# Altium PCB old_pcb.PcbDoc
Units mil, origin at the board's own origin, x right, y up, seen from the top; angles counter-clockwise.
Board outline 250 x 212 mil, 2 copper layers (Top Layer, Bottom Layer); 24 components, 18 nets, 66 pads, 20 vias.
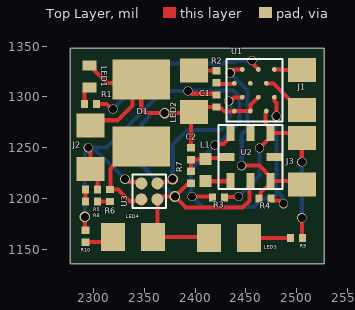
[diagram p0: Top Layer view]
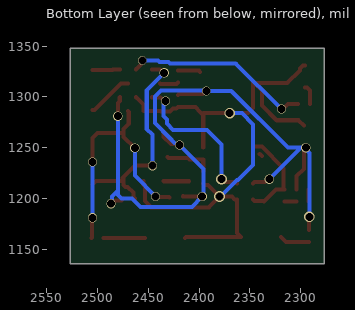
[diagram p1: Bottom Layer view, seen from below]

## Layer stack, top to bottom
Top Solder: solder mask 0.4, Solder Resist, Dk 3.5
Top Layer: signal copper 1.4
Dielectric 1: dielectric 12.6, FR-4, Dk 4.8
Bottom Layer: signal copper 1.4
Bottom Solder: solder mask 0.4, Solder Resist, Dk 3.5

## Board outline
2277,1136 2527,1136 2527,1348 2277,1348

## Design rules (kind name [scope] priority, off if disabled: settings)
Clearance [All] p1: gap=4 ignorepadtopadclearanceinfootprint=FALSE except(0: Arc-Text Arc-Hole Track-Text Track-Hole SMDPad-Text SMDPad-Hole THPad-Text THPad-Hole Via-Text Via-Hole Fill-Text Fill-Hole Poly-Text Poly-Hole Region-Text Region-Hole Text-Text Text-Hole; 3.9: SMDPad-SMDPad)
HoleToHoleClearance [All] p1: gap=4 allowstackedmicrovias=TRUE
MinimumSolderMaskSliver [All] p1: minsoldermaskwidth=3.92
PolygonConnect [All] p1: connectstyle=Relief reliefconductorwidth=10 reliefentries=4 polygonreliefangle="90 Angle" airgapwidth=10
RoutingVias [All] p1: holewidth=28 width=50 viastyle="Through Hole" minholewidth=28 minwidth=50 maxholewidth=28 maxwidth=50
SilkToSilkClearance [All] p1: silktosilkclearance=0
SilkToSolderMaskClearance [IsPad] p1: minsilkscreentomaskgap=0 clearancetoexposedcopper=TRUE
SolderMaskExpansion [All] p1: expansion=0 istentingtop=FALSE
Width [All] p1: maxlimit=10 minlimit=4 preferedwidth=4 minimp=50.000000 maximp=50.000000 favimp=50.000000
26 further rules are at their usual default settings.

## Components (designator, comment, footprint, x,y, rotation, side; value= is the part's Value field where it differs from the comment)
C1 "0.1 uF" 01005 2421,1295.91 r180 top
C2 "0.1 uF" 01005 2396,1244.09 r0 top
D1 "Photodiode" FP-6_541-5064_01-4-MFG 2347,1282 r90 top
J1 "0402" 0402#1 2505,1307 r0 top
J2 "0402" 0402#2 2297,1252 r0 top
J3 "0402" 0402#3 2505,1240 r0 top
L1 "Antenna Header" 0402#4 2410,1243 r0 top
LED1 "Red" 0201 2296,1320 r0 top
LED2 "IR" 0402#5 2399,1305 r180 top value="IR LED"
LED3 "IR" 0402#1 2433.59,1161.09 r90 top value="IR LED"
LED4 "IR" 0402#1 2339,1162 r270 top value="IR LED"
R1 "220" 01005 2296.91,1293 r90 top
R2 "220" 01005 2421,1319.91 r0 top
R3 "4.7k" 01005 2423.09,1201 r270 top value="0.1 uF"
R4 "4.7k" 01005 2468.91,1200 r90 top value="0.1 uF"
R5 "Ohms" 01005 2298.09,1209 r90 top value=1M
R6 "1M" 01005 2316,1202.91 r0 top
R7 "220" 01005 2396,1220.91 r180 top
R8 "1M" 01005 2298.09,1197 r270 top
R9 "220" 01005 2499.91,1161 r90 top
R10 "220" 01005 2292,1162.91 r180 top
U1 "ATTiny20" ATTINY10 2478,1327 r180 top
U2 "NFC" NFC 2454.62,1241 r270 top
U3 "opamp buffer" opamp 2355,1207 r90 top

## Footprints (in the part's own frame and the unit in brackets; to place one, negate y for a bottom-side part, rotate by r counter-clockwise, add the part's x,y. Pads: shape width x height; smd on the part's side, far side on the other; paste and mask are expansions set on the pad)
0201 [mm]
  rect 0.35x0.25 smd: 0(0,0.275) 1(0,-0.275)
0402#1 [mm]
  rect 0.7x0.6 smd: 0(0,0.5) 1(0,-0.5)
0402#2 [mm]
  rect 0.7x0.6 smd: 0(0,0.5) 1(0,-0.584)
0402#3 [mm]
  rect 0.7x0.6 smd: 0(0,0.5) 1(0,-0.66)
0402#4 [mm]
  rect 0.3x0.3 smd: 0(0,-0.102) 1(0,-0.66)
0402#5 [mm]
  rect 0.7x0.6 smd: 0(0,0.5) 1(0,-0.533)
01005 [mm]
  rect 0.2x0.18 smd: 0(0,0.15) 1(0,-0.15)
ATTINY10 [mm]
  round 0.12 smd: 1A(1,1.039) 1C(1,0.346) 2B(0.8,0.693) 2D(0.8,0) 3A(0.6,1.039) 3C(0.6,0.346) 4B(0.4,0.693) 4D(0.4,0) 5A(0.2,1.039) 5C(0.2,0.346) 6B(0,0.693) 6D(0,0)
  silkscreen extent -0.2,-0.26 1.2,1.3
FP-6_541-5064_01-4-MFG [mm]
  rect 1x1.45 smd paste+0 mask+0: 1(-0.786,0) 2(0.889,0)
  body extent -1.4,-0.82 1.4,0.82, height 0.25
NFC [mm]
  rect 0.4x0.2 smd: 1(0.6,-0.5) 2(0.6,0) 3(0.6,0.5) 5(-0.6,0.5) 6(-0.6,0) 7(-0.6,-0.5)
  rect 0.2x0.4 smd: 4(0,0.6) 8(0,-0.6)
  silkscreen extent -0.8,-0.8 0.8,0.8
opamp [mm]
  round 0.3 smd: 1A(-0.2,0.2) 1B(-0.2,-0.2) 2A(0.2,0.2) 2B(0.2,-0.2)
  silkscreen extent -0.42,-0.42 0.42,0.42

## Part data
C1 C2 R3 R4: library part 01005, "01005 Component", MPN=CL02A104KQ2NNNC
D1: library part CMP-02531-000004-1, "0805 PHOTODIODE / temd7000x01", Ambient Temperature Range High=+100°C, Ambient Temperature Range Low=-40°C, Dark Current=0.0001uA, Manufacturer=Vishay, MPN=TEMD6200FX01, Package=6.541-5064.01-4, Power Dissipation=100mW, Reverse Breakdown Voltage=16V, Temperature="-40°C to +100°C", Automotive=Yes, Automotive Grade="Grade 3", Category=Diode, ComponentLink2Description=Datasheet, ComponentLink2URL=http://www.vishay.com/docs/81812/temd6200.pdf, Device Class L1=Sensors, Device Class L2="Optical Sensors", Device Class L3=Photodiodes, Digikey Description="SENSOR PHOTODIODE 540NM 0805", Height=0.95mm, Lead Free=Yes, Max Junction Temp=+100°C, Mouser Description="Ambient Light Sensors 16V 100mW 60Deg AEC-Q101 Qualified", Octopart=https://octopart.com/temd6200fx01-vishay-19158932, RoHS=TRUE, Sensor Output=Photodiode, Temperature Range High=+100°C, Temperature Range Low=-40°C, Viewing Angle=120°
J1 J2 J3: "0402 Component"
L1: library part 0402, "0402 Component"
LED1: library part 0201, "0201 Component / XZMDR155W", MPN=XZMDR155W
LED2 LED3 LED4: library part 0402, "0402 Component / SFH 4043", MPN="SFH 4043"
R1 R2 R7 R9 R10: library part 01005, "01005 Component / CRCW0100220RFREL", MPN=CRCW0100220RFREL
R5: library part 01005, "01005 Component / CRCW01001M00FREL / <Placeholder if more gain is necessary>", MPN=CRCW01001M00FREL
R6 R8: library part 01005, "01005 Component / CRCW01001M00FREL", MPN=CRCW01001M00FREL
U3: library part Op-amp

## Via types
v1: diameter 9, hole 7.87, Top Layer to Bottom Layer, 9 vias
v2: diameter 10.5, hole 7.87, Top Layer to Bottom Layer, 4 vias
v3: diameter 9.5, hole 7.87, Top Layer to Bottom Layer, 4 vias
v4: diameter 8.8, hole 7.87, Top Layer to Bottom Layer, 3 vias

## Nets (pads, with @x,y where several pads share a name; then routed paths per layer and width w, separated by ;. In a path a pad name is that pad's centre, name@x,y a point inside that pad or via, vN(x,y) a via of type N, cw(c..) or ccw(c..) an arc to the next point about the centre after c; other vN are vias at no path point)
Ant: C2.1 L1.0 R7.1 U2.8 | length 47.6
  Top Layer w4: R7.1 C2.1 2396.41,1238.59 2409.41,1238.59 2409.5,1238.5 L1.0 2411,1240 2430,1240 U2.8
GND: C1.0 C2.0 D1.2 J2.0 LED1.0 LED2.0 LED3.0 LED4.0 R7.0 U1.1A U1.3A U1.4B U2.2 U3.1B | length 672
  Top Layer w4: LED1.0 2297.97,1330.83 2300.89,1327.91 2300.89,1325.94 2313.33,1313.5 D1.2@2345.29,1313.5 ; J2.0 2302.32,1277 2323.64,1277 2338.3,1291.66 2338.3,1306.3 2347,1315 2347,1288.92 2351.92,1284 v2(2370,1284) LED2.0@2396,1284 ; 2390.5,1191 2447.22,1191 ; 2390.5,1191.5 v2(2380,1202) ; R7.0 2394.46,1213.46 2391.46,1213.46 v2(2380,1202) ; C2.0 2396,1282.32 LED2.0 2403.68,1290 C1.0 2422.54,1288.46 2425.72,1288.46 2428.76,1285.42 2437.76,1285.42 2438.43,1286.09 U1.1A U1.3A 2454.52,1286.23 2454.52,1291.98 U1.4B U1.4B@2462.25,1299.52 ; LED3.0 2413,1162 LED4.0 2362.87,1166.19 U3.1B 2364.99,1199.13 2367.86,1202 v2(2380,1202) ; 2447.22,1191.5 2453.46,1197.74 U2.2@2453.46,1213.44 ; U2.2@2454.62,1213.44 U2.2
  Bottom Layer w4: v2(2370,1284) 2357.99,1284 2347,1273.01 2347,1233 2361.88,1218.12 2362.97,1218.12 2379.09,1202 v2(2380,1202)
LED1: R1.1 U1.4D | length 186.7
  Top Layer w4: R1.1 2312.7,1293 2317.7,1288 v4(2319,1288) ; v4(2456,1336) 2456.92,1335.08 2456.92,1332.53 2462.25,1327.2 U1.4D
  Bottom Layer w4: v4(2319,1288) 2364,1333 2428.58,1333 2429.98,1334.4 2438.88,1334.4 2440.49,1336 v4(2456,1336)
LED2: R2.1 U1.1C | length 18.3
  Top Layer w4: R2.1 2422.1,1312.9 2437.97,1312.9 2438.43,1313.36 U1.1C
NetL1_1: L1.1 U2.1 | length 25.1
  Top Layer w4: L1.1 2434.56,1217 U2.1
NetLED1_1: LED1.1 R1.0 | length 19.4
  Top Layer w4: R1.0 2291.11,1293.11 2291.11,1306.25 2294.03,1309.17 LED1.1
NetLED2_1: LED2.1 R2.0 | length 22.5
  Top Layer w4: LED2.1@2399,1324.68 2400.13,1325.81 R2.0
NetLED3_1: LED3.1 R9.0 | length 40.8
  Top Layer w4: LED3.1 2453.37,1161 R9.0
NetLED4_1: LED4.1 R10.0 | length 29.4
  Top Layer w4: R10.0 2314.32,1157 LED4.1
NetR5_0: R5.0 R8.1 | length 12
  Top Layer w4: R8.1 R5.0
NetR6_1: R6.1 R8.0 | length 12.1
  Top Layer w4: R8.0 R6.1
PD: D1.1 R6.0 U3.1A | length 100.2
  Top Layer w4: D1.1@2338.14,1241.65 D1.1@2340.36,1243.86 ; D1.1 2338.14,1251.04 2316.78,1229.68 2316.78,1209.59 R6.0 2324.35,1208.81 2336.04,1197.13 2336.54,1197.63 2345.63,1197.63 U3.1A
PD_BUFF: U1.2B U3.2B | length 152.6
  Top Layer w4: U3.2B 2364.37,1216.37 2373.61,1216.37 2376.24,1219 v2(2378,1219) ; v1(2433.11,1295.92) 2434.46,1295.92 2438.12,1299.58 2446.37,1299.58 U1.2B
  Bottom Layer w4: v2(2378,1219) 2378,1253 2392.46,1267.46 2425.63,1267.46 2431.78,1273.61 2431.78,1277.78 2435,1281 2435,1292 2434.96,1292.04 2434.96,1292.72 2433.11,1294.57 v1(2433.11,1295.92)
SCL: J3.1 R4.0 U1.2D U2.3 | length 202.6
  Top Layer w4: 2438.49,1326.86 2446.37,1326.86 U1.2D ; v1(2445.9,1232.28) 2463.35,1232.28 U2.3@2474.31,1221.32 ; R4.0 2464.54,1201.54 2464.54,1205.7 2470.35,1211.5 2472.37,1211.5 2474.31,1213.44 U2.3 ; U2.3@2475.31,1220.32 U2.3@2474.31,1221.32 ; J3.1 2501.62,1217.38 U2.3 ; U2.3 U2.3@2474.31,1221.32
  Bottom Layer w4: v3(2434.43,1323.65) 2451.61,1306.46 2451.61,1268.61 2445.9,1262.9 v1(2445.9,1232.28)
SDA: J3.0 R3.0 R9.1 U1.5A U2.5 | length 245.8
  Top Layer w4: R3.0 2429.5,1201.5 2442.37,1201.5 v1(2442.87,1202) ; v1(2463.35,1249.72) 2474.31,1260.68 U2.5 ; U1.5A@2470.13,1286.29 U1.5A 2470.13,1285.9 2469.28,1285.06 2469.28,1273.58 2474.31,1268.56 U2.5 ; v1(2505,1181) 2505.41,1180.59 2505.41,1161.41 R9.1 ; v1(2505,1236) J3.0 2500.06,1264.62 U2.5
  Bottom Layer w4: v1(2442.87,1202) 2463.35,1222.48 v1(2463.35,1249.72) ; v1(2505,1181) v1(2505,1236)
TPICLK: J1.0 U1.6D | length 27.1
  Top Layer w4: U1.6D 2478.14,1326.86 2485.04,1326.86 2485.22,1326.68 J1.0
TPIDATA: J1.1 U1.5C | length 45.7
  Top Layer w4: U1.5C 2476.99,1313.36 2503.03,1287.32 J1.1
VCC: C1.1 J2.1 R3.1 R4.1 R5.1 R10.1 U1.6B U2.7 U3.2A | length 752
  Top Layer w4: v2(2291.48,1181.92) 2291.74,1181.66 2291.74,1169.07 R10.1 ; v3@2297,1246.65 J2.1 2304,1222 R5.1 ; 2335.22,1216.27 2345.73,1216.27 U3.2A ; 2396.92,1303.13 2419.68,1303.13 C1.1 ; v1(2397,1202) 2415.65,1202 R3.1@2415.8,1202.16 ; v1(2419.48,1252.62) 2420.44,1253.57 2427.82,1253.57 2434.94,1260.68 U2.7 ; R4.1 2474.81,1199.61 2476.35,1198.06 2482.34,1198.06 2485.53,1194.88 v1(2486.88,1194.88) ; U1.6B 2478.14,1299.58 2478.14,1295.76 2480.03,1293.86 v3(2480.03,1281.06)
  Bottom Layer w4: v2(2291.48,1181.92) 2291.48,1245 2295,1248.51 v3(2295,1250) 2312.67,1250 2368.42,1305.75 v4(2393,1305.75) 2393.67,1306.42 2437.46,1306.42 2443.61,1300.27 2443.61,1274.12 2428.94,1259.46 2424.22,1254.73 ; 2301.05,1248.95 v3(2331,1219) ; v1@2395.81,1202.96 2395.81,1228.94 v1(2419.48,1252.62) ; v1(2397,1202) 2407.26,1191.74 2407.26,1191.5 2457.78,1191.5 2466.28,1200 2476.6,1200 2480.03,1203.44 2480.03,1207.98 ; v3(2480.03,1281.06) 2480.03,1207.98 ; v1(2486.88,1194.88) 2485.92,1195.84 2485.92,1202.09 2480.03,1207.98
pads on no net: U1.3C U2.4 U2.6

## Silkscreen, mask and mechanical layers (free items; w line width, h text height)
Mechanical 1:
  the board outline again, w2